# Altium PCB PCB_power.PcbDoc (part 2 of 2)
Units mil, origin at the board's own origin, x right, y up, seen from the top; angles counter-clockwise.
Board outline 6691.63 x 4180 mil, 4 copper layers (Top Layer, PWR Plane, GND Plane, Bottom Layer), stack 43.624 mil thick; 88 components, 48 nets, 304 pads, 150 vias.
Unrouted connection lines stored in the file: 3.
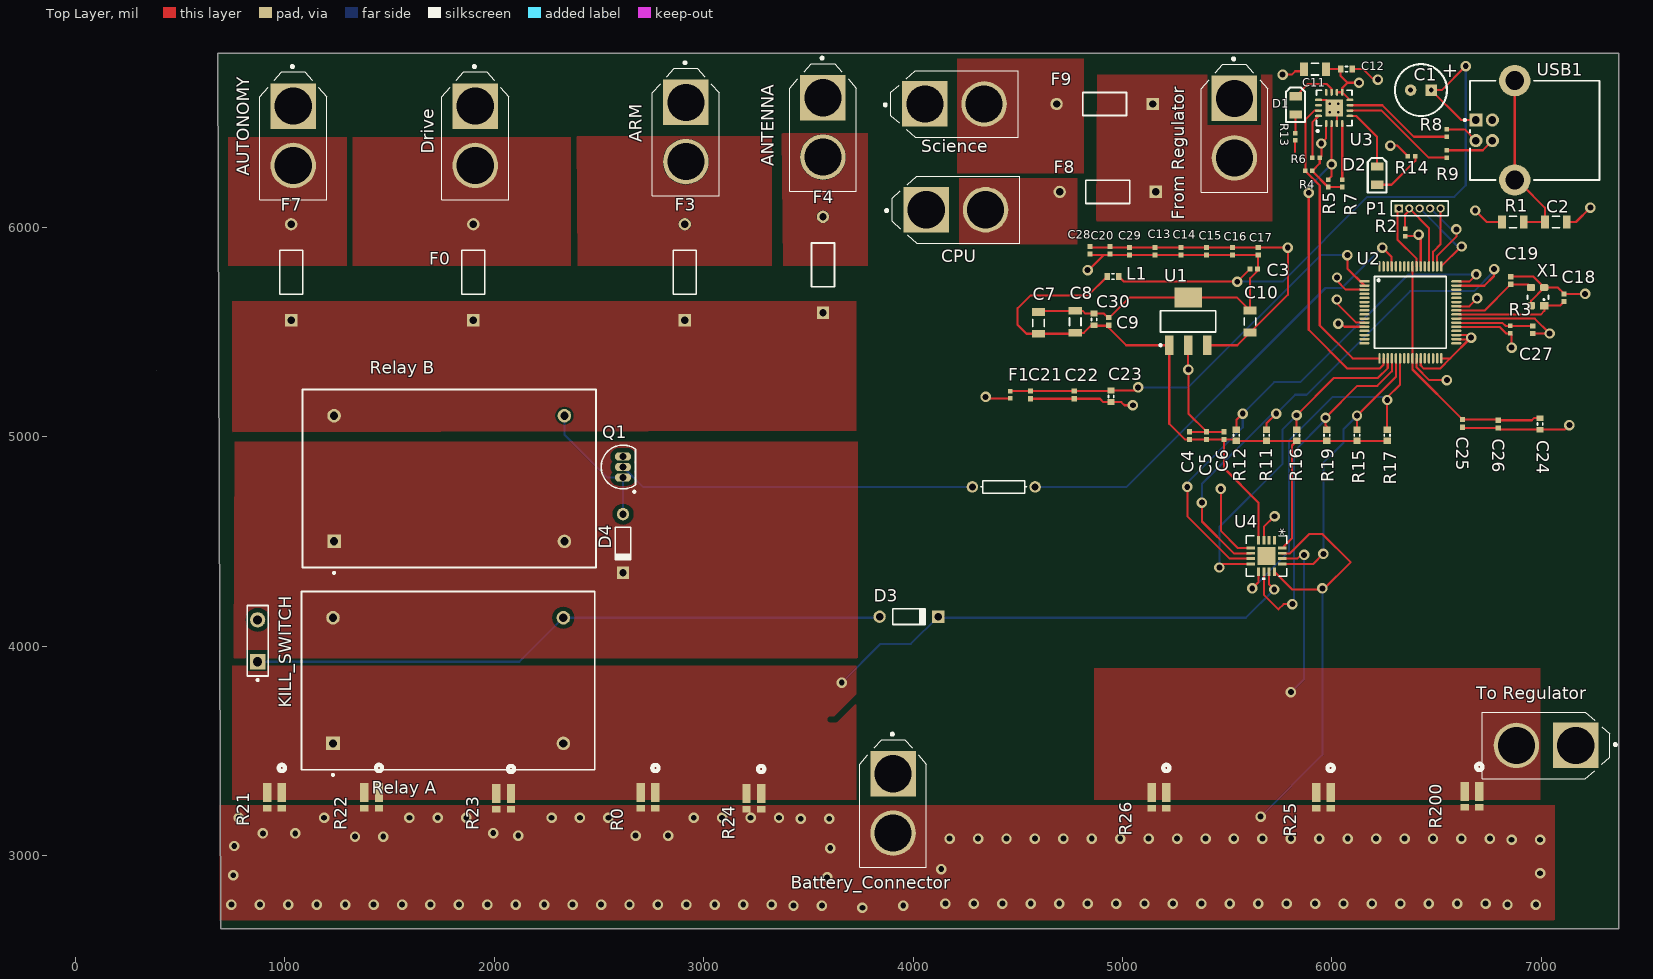
[diagram p0: Top Layer view]

## Via types
v1: diameter 50, hole 28, Top Layer to PWR Plane, 100 vias
v2: diameter 50, hole 28, Top Layer to Bottom Layer, 35 vias
v3: diameter 50, hole 28, Top Layer to GND Plane, 15 vias

## Nets (pads, with @x,y where several pads share a name; then routed paths per layer and width w, separated by ;. In a path a pad name is that pad's centre, name@x,y a point inside that pad or via, vN(x,y) a via of type N, cw(c..) or ccw(c..) an arc to the next point about the centre after c; other vN are vias at no path point) (continued)
pads on no net: U2.1 U2.4 U2.5 U2.6 U2.7 U2.8 U2.9 U2.10 U2.13 U2.14 U2.15 U2.16 U2.23 U2.24 U2.28 U2.29 U2.30 U2.31 U2.33 U2.36 U2.43 U2.44 U2.45 U2.46 U2.53 U2.57 U2.58 U2.59 U2.60 U2.62 U2.63 U2.64 U3.12 U3.14 U4.1 U4.2 U4.17

## Polygon pours and split planes (outlines as drawn)
IN-1 on Top Layer "Top Layer-IN-1" (solid, pour order 120): 748.68,3905 3728.68,3905 3728.68,3265 748.68,3265
RELAY_A on Top Layer "Top Layer-RELAY_A" (solid, pour order 126): 754.98,3941.46 3735.11,3941.31 3735.11,4976.33 760.11,4976.33 760.11,4981.33
RELAY_B on Top Layer "Top Layer-RELAY_B" (solid, pour order 132): 3730,5028.17 3730,5646.91 748.23,5646.91 748.23,5021.87
"CPU Connector" on Top Layer "Top Layer-CPU Connector" (solid, pour order 152): 4220,6233.7 4785,6233.7 4785,5918.7 4220,5918.7
"Science Connector" on Top Layer "Top Layer-Science Connector" (solid, pour order 150): 4212.42,6803.7 4815,6803.7 4815,6258.7 4212.42,6258.7
12V on Top Layer "Top Layer-12V" (solid, pour order 148): 4880,6728.7 4890,6728.7 5715,6728.7 5715,6028.7 4875,6028.7
no net on Top Layer "Top Layer-No Net 2" (solid, pour order 142): 3373.77,6450 3785,6450 3785,5815 3379.47,5815
no net on Top Layer "Top Layer-No Net 3" (solid, pour order 140): 2393.91,6435 3330,6435 3325,6430 3325,5815 2399.47,5815
NetDrive_2 on Top Layer "Top Layer-NetDrive_2" (solid, pour order 138): 1325,6430 2365,6430 2365,5815 1325,5815
NetAUTONOMY_2 on Top Layer "Top Layer-NetAUTONOMY_2" (solid, pour order 136): 730,6430 1295,6430 1295,5815 730,5815
no net on Top Layer "Top Layer-No Net 7" (solid, pour order 134): 720,6395
no net on Top Layer "Top Layer-No Net 10" (solid, pour order 130): 3140,5215
IN-2 on Top Layer "Top Layer-IN-2" (solid, pour order 128): 4865,3895 6995,3895 6995,3265 4865,3265
no net on Top Layer "Top Layer-No Net 11" (solid, pour order 124): 720,4125
no net on Top Layer "Top Layer-No Net 12" (solid, pour order 122): 740,5160
no net on Top Layer "Top Layer-No Net 13" (solid, pour order 118): 715,4295
no net on Top Layer "Top Layer-No Net 14" (hatched Horizontal grid 20 track 8, pour order 106): 750,3865
IN+1 on Top Layer "Top Layer-IN+1" (solid, pour order 104): 690,3240 7065,3240 7065,2685 7060,2690 690,2690
no net on Top Layer "Top Layer-No Net 15" (solid, pour order 102): 680,3508.83
no net on Top Layer "Top Layer-No Net 9" (solid, pour order 54): 1845,3508.83
no net on Top Layer "Top Layer-No Net 8" (solid, pour order 40): 10370,8030.87
no net on Top Layer "Top Layer-No Net 6" (solid, pour order 36): 0,5640
no net on Top Layer "Top Layer-No Net 4" (solid, pour order 26): 2045,3508.83
no net on Top Layer "Top Layer-No Net" (solid, pour order 8): -10,5840
no net on Top Layer "Top Layer-No Net 1" (solid, pour order 4): -10,5015
GND on GND Plane (split plane): 7349.9,2670.1 713.46,2670.1 698.53,6809.9 7349.9,6809.9
IN-2 on PWR Plane (split plane): 7349.9,3260.08 4555.08,3260.08 4555.08,3904.92 7349.9,3904.92
+3.3V on PWR Plane (split plane): 7349.9,4114.96 7349.71,4114.74 7347.66,4111.38 7346.15,4107.75 7345.23,4103.92 7344.92,4100 7344.92,3955.08 4010.08,3955.08 4010.08,5005 4010.08,5714.61 4030.39,5734.92 4681.89,5734.92 4685.81,5735.23 4689.64,5736.15 4693.27,5737.66 4696.63,5739.71 4699.62,5742.27 4887.28,5929.92 5720,5929.92 5723.92,5930.23 5727.75,5931.15 5731.38,5932.66 5734.74,5934.71 5737.73,5937.27 5767.73,5967.27 5770.29,5970.26 5772.34,5973.62 5773.85,5977.25 5774.77,5981.08 5775.08,5985 5775.08,6809.9 7349.9,6809.9
IN+1 on PWR Plane (split plane): 7349.9,2670.1 713.46,2670.1 711.52,3209.92 7349.9,3209.92
no net on PWR Plane (split plane): 5724.92,5995.39 5709.61,5980.08 4876.89,5980.08 4872.97,5979.77 4869.14,5978.85 4865.5,5977.34 4862.15,5975.29 4859.16,5972.73 4671.5,5785.08 4020,5785.08 4016.08,5784.77 4012.25,5783.85 4008.62,5782.34 4005.26,5780.29 4002.27,5777.73 3967.27,5742.73 3964.71,5739.74 3962.66,5736.38 3961.15,5732.75 3960.23,5728.92 3959.92,5725 3959.92,5030.08 704.95,5030.08 698.53,6809.9 5724.92,6809.9
RELAY_A on PWR Plane (split plane): 3959.92,3955.08 708.83,3955.08 705.13,4979.92 3959.92,4979.92
IN-1 on PWR Plane (split plane): 4504.92,3260.08 711.33,3260.08 709.01,3904.92 4504.92,3904.92

## Other copper
Top Layer:
  region: 2802.52,3508.83
  region: -10,5335
PWR Plane (plane layer: these items are gaps in the copper):
  lines w50: 680,3930 4530,3930 4530,3235 ; 689.93,5005 3985,5005 ; 690,3235 7365,3235 ; 5750,6840 5750,5985 5720,5955 4876.89,5955 4681.89,5760 4020,5760 3985,5725 3985,3930 7370,3930 7370,4100

## Text inside footprints (layer, text, board x,y; h text height)
C1: Top Overlay "+" at 6524.25,6716.53 h70
R200: Mechanical 7 "\" at 6924.84,3400.08 h25 r270; Mechanical 7 "0.035in/0.889mm" at 6674.84,3967.5 h25 r270; Mechanical 7 "0.045in/1.143mm" at 6829.68,3372.66 h25 r270
U4: Top Overlay "*" at 5729.46,4561.99 h50 r270; Mechanical 13 "*" at 5714.46,4487.62 h50 r270